# EAGLE board Commutator_Adaptor (EAGLE 9.0.0)
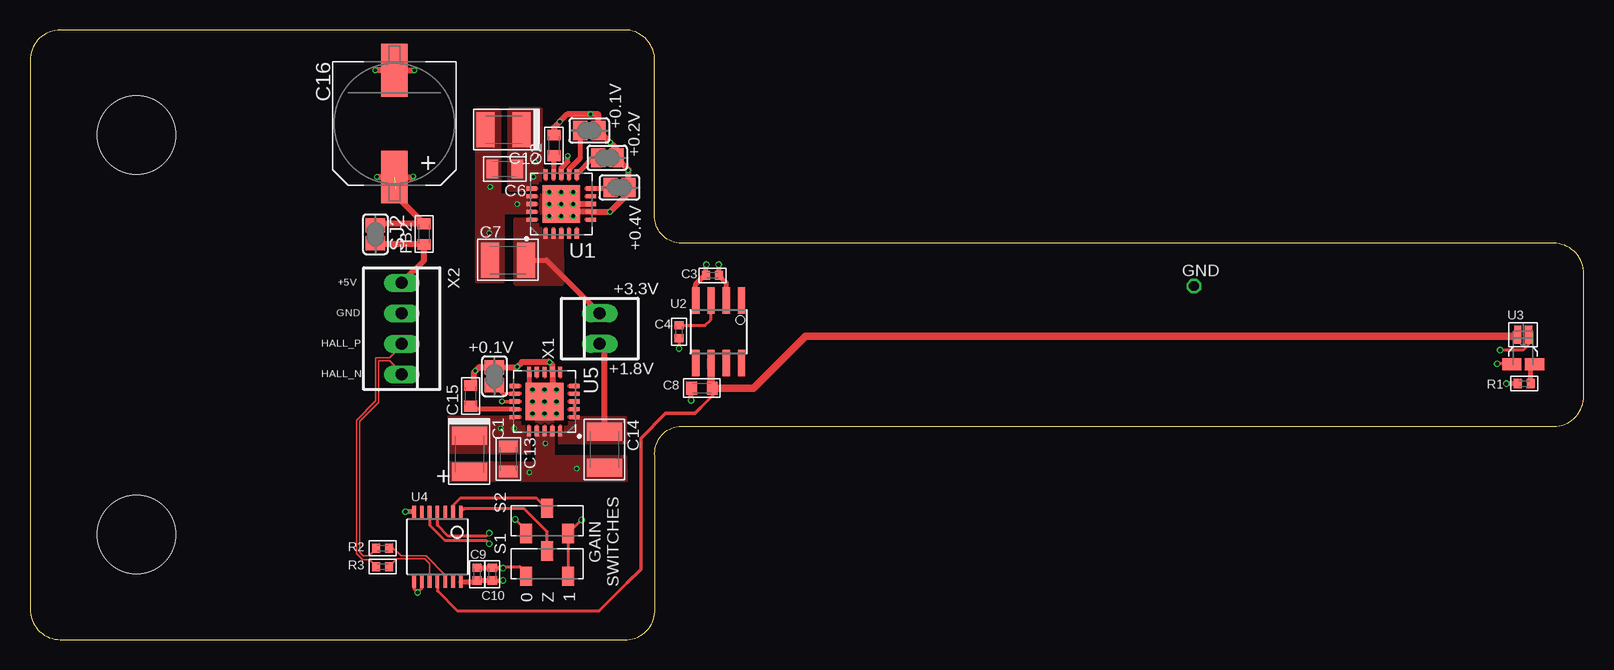
[diagram p0: board, top side]
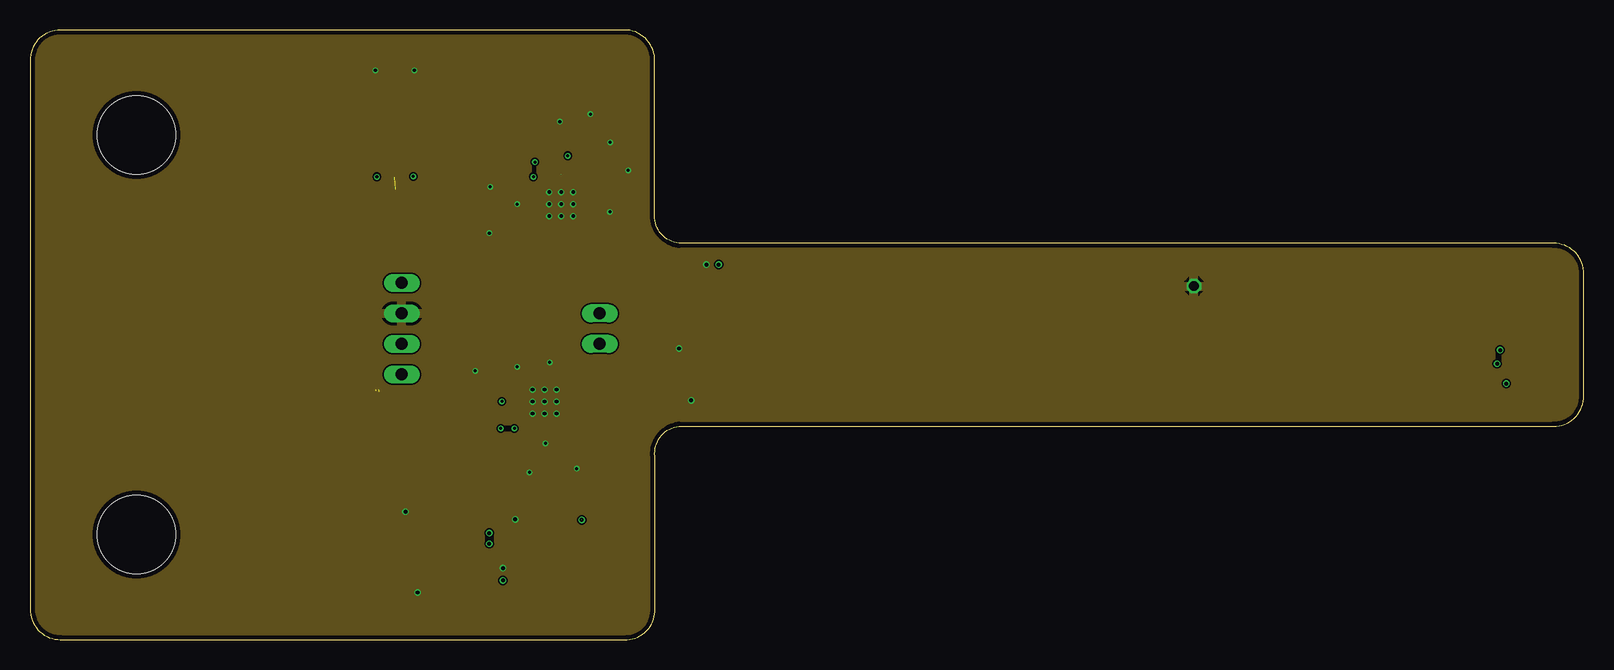
[diagram p1: board, inner layer Route2]
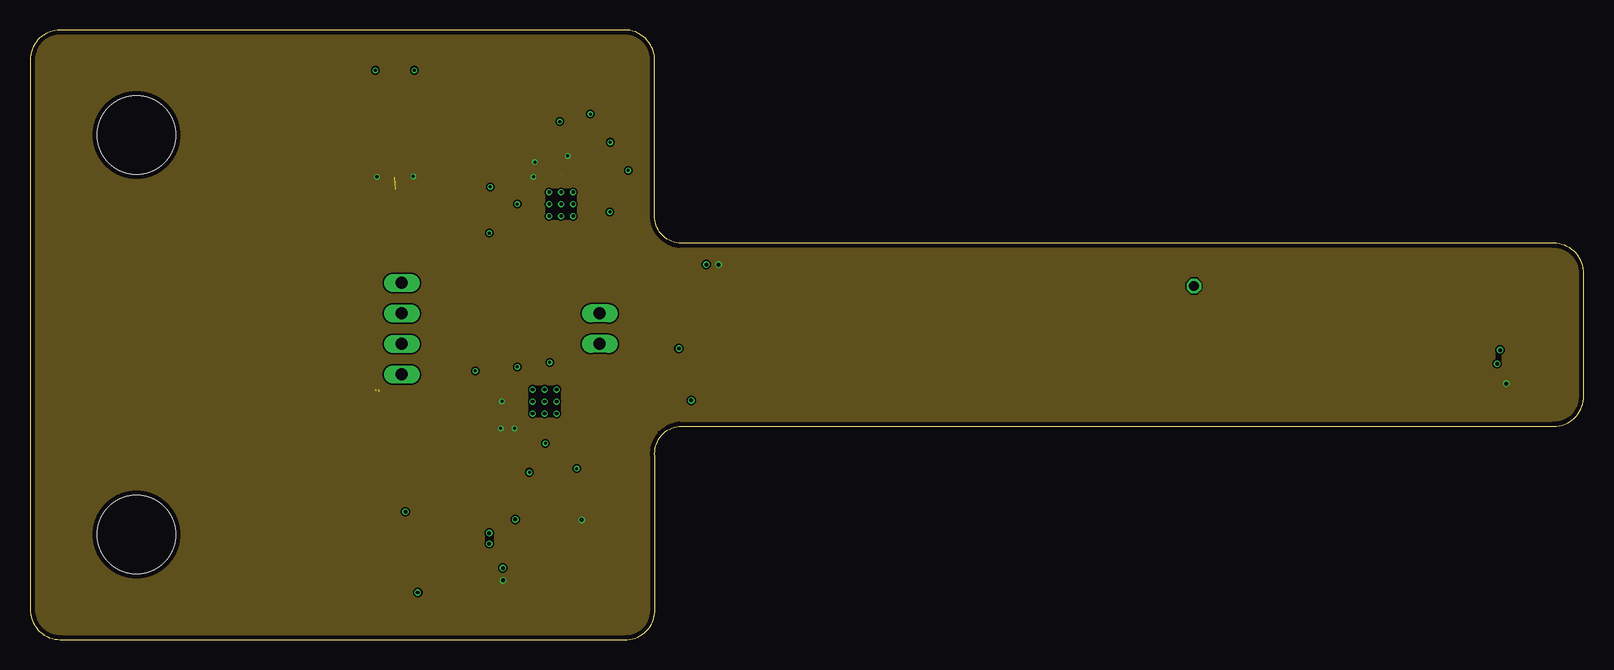
[diagram p2: board, inner layer Route15]
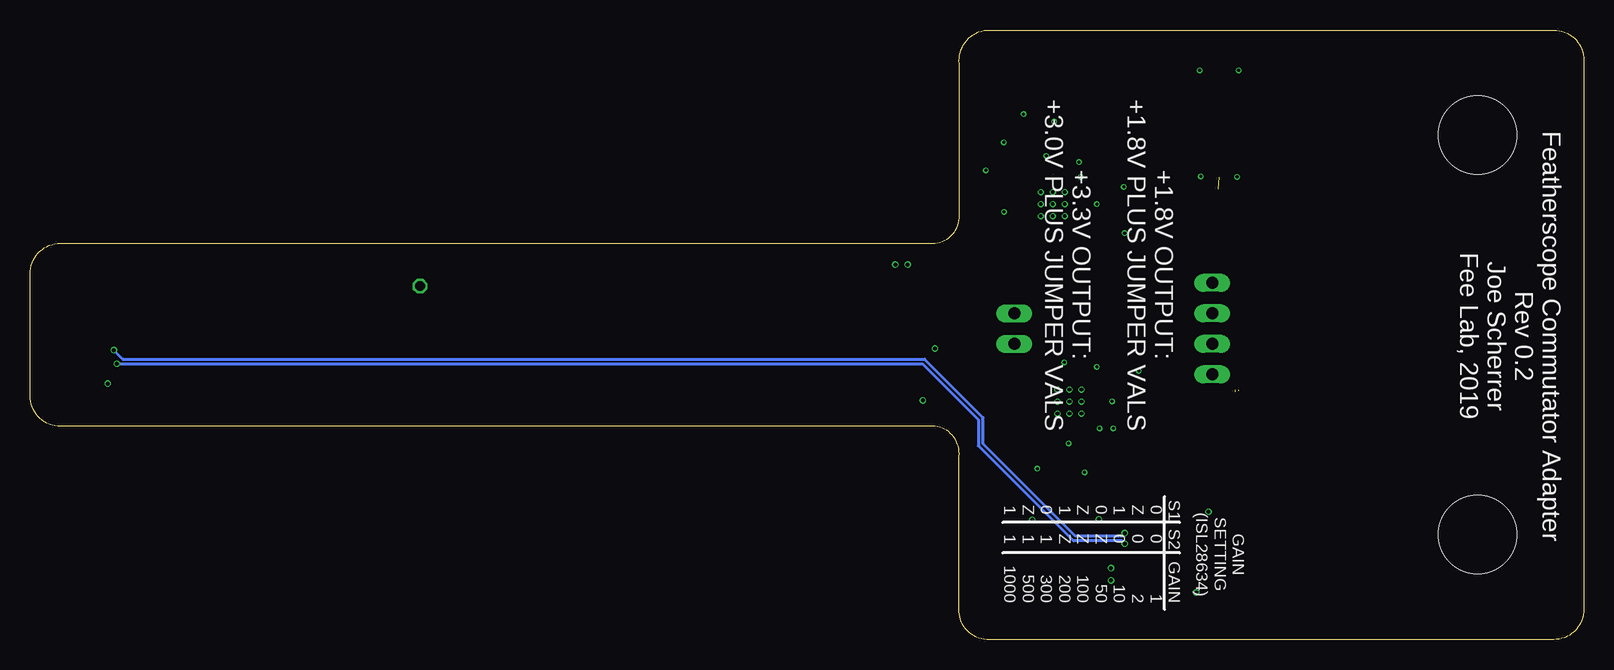
[diagram p3: board, bottom side, seen from below]

Size 129.54 x 50.8 mm. Coordinates in mm from the lower left corner, seen from the top.
Outline: 49.78,0 arc90 52.09,2.57 52.09,15.27 arc-90 54.1,17.78 127,17.78 arc90 129.54,20.32 129.54,30.48 arc90 127,33.02 54.1,33.02 arc-90 52.07,35.56 52.07,48.01 arc90 49.78,50.8 2.54,50.8 arc90 0,48.26 0,2.54 arc90 2.54,0 49.78,0
Copper layers (1*2*15*16): Top 0.035559375mm / dielectric 0.17018125mm / Route2 0.01778125mm / dielectric 47mil / Route15 0.01778125mm / dielectric 0.17018125mm / Bottom 0.035559375mm
Design rules "OSHPark-4layer *": minimum track width 5mil, minimum drill 10mil, track to track 5mil, track to pad 5mil, pad to pad 5mil, via to via 5mil, smd to smd 5mil, copper to edge 15mil, drill to drill 6mil, minimum pad ring 4mil, minimum via ring 4mil, stop-mask expansion 2.5mil, vias tented up to drill 15mil, thermal gap 10mil
Holes 6.53 mm at 8.89,8.76 8.89,42.04

## Footprints (pad centres in the part's own frame; a part is rotated, then mirrored left to right if it is on the bottom)
SJ = smd 1.168 x 1.6: 1 -0.762,0; 2 0.762,0
1210POL = smd 1.5 x 2.9: NEG 1.5,0; POS -1.5,0
0603 = smd 0.889 x 1.067: 1 -0.864,0; 2 0.864,0
0402 = smd 0.686 x 0.762: 1 -0.533,0; 2 0.533,0
0805 = smd 0.965 x 1.524: 1 -1.041,0; 2 1.041,0
1210 = smd 1.5 x 2.9: NEG 1.5,0; POS -1.5,0
JA0 = smd 4.4 x 2.2: NEG -4.45,0; POS 4.45,0
TESTPOINT_SMALL = drill 0.813 octagon: 1 0,0
CJS-1201A1 = smd 1 x 1.6: P$1 -1.75,-1.05; P$2 0,1.05; P$3 1.75,-1.05
20-VQFN(5X5) = smd 0.35 x 0.825: P1 1.3,2.487; P2 0.65,2.487; P3 0,2.487; P4 -0.65,2.487; P5 -1.3,2.487; P11 -1.3,-2.487; P12 -0.65,-2.487; P13 0,-2.487; P14 0.65,-2.487; P15 1.3,-2.487 | smd 0.825 x 0.35: P6 -2.487,1.3; P7 -2.487,0.65; P8 -2.487,0; P9 -2.487,-0.65; P10 -2.487,-1.3; P16 2.487,-1.3; P17 2.487,-0.65; P18 2.487,0; P19 2.487,0.65; P20 2.487,1.3 | smd 3.15 x 3.15: THERMAL@1 0,0 | drill 0.3: THERMAL@2 -1,1; THERMAL@3 0,1; THERMAL@4 1,1; THERMAL@5 -1,0; THERMAL@6 0,0; THERMAL@7 1,0; THERMAL@8 -1,-1; THERMAL@9 0,-1; THERMAL@10 1,-1
SO08 = smd 0.61 x 2.21: 1 -1.905,-2.616; 2 -0.635,-2.616; 3 0.635,-2.616; 4 1.905,-2.616; 5 1.905,2.616; 6 0.635,2.616; 7 -0.635,2.616; 8 -1.905,2.616
HGT-2101-SIDE = smd 0.6 x 1.5: PIN1 -0.45,0; PIN2 0.45,0 | smd 1.6 x 1: WIRE1 -0.95,-2.45; WIRE2 0.95,-2.45
TSSOP14 = smd 0.305 x 0.991: 1 -1.95,-2.918; 2 -1.3,-2.918; 3 -0.65,-2.918; 4 0,-2.918; 5 0.65,-2.918; 6 1.3,-2.918; 7 1.95,-2.918; 8 1.95,2.918; 9 1.3,2.918; 10 0.65,2.918; 11 0,2.918; 12 -0.65,2.918; 13 -1.3,2.918; 14 -1.95,2.918
22-23-2021 = drill 1 long: 1 -1.27,0; 2 1.27,0
22-23-2041 = drill 1 long: 1 -3.81,0; 2 -1.27,0; 3 1.27,0; 4 3.81,0

## Placement (x,y rotation side)
0P1  [SJ]  38.71,21.95 270 top
0P1V  [SJ]  46.62,42.42 180 top
0P2V  [SJ]  48.12,40.14 180 top
0P4V  [SJ]  49.14,37.67 180 top
C1  47uF  [1210POL]  36.64,15.47 270 top
C2  1uF  [0603]  43.68,41.18 90 top
C3  100nF  [0402]  56.9,30.35 180 top
C4  DNP  [0402]  54.1,25.65 270 top
C6  10uF  [0805]  39.57,39.21 180 top
C7  47uF  [1210]  39.83,31.62 180 top
C8  1uF  [0603]  56.01,20.96 180 top
C9  10nF  [0402]  37.27,5.45 90 top
C10  100nF  [0402]  38.54,5.45 90 top
C12  47uF  [1210POL]  39.5,42.49 180 top
C13  10uF  [0805]  39.88,15.05 270 top
C14  47uF  [1210]  47.9,15.84 270 top
C15  1uF  [0603]  36.72,20.3 90 top
C16  220uF  [JA0]  30.39,43 270 top
FB2  470  [0603]  32.85,33.79 90 top
GND  TESTPOINT_SMALL  [TESTPOINT_SMALL]  97.03,29.46 0 top
R1  1.6k  [0402]  124.56,21.34 0 top
R2  50  [0402]  29.39,7.61 180 top
R3  50  [0402]  29.39,6.08 180 top
S1  CJS-1201  [CJS-1201A1]  43.11,6.34 0 top
S2  CJS-1201  [CJS-1201A1]  43.11,9.89 0 top
SJ2  [SJ]  28.8,33.78 270 top
U1  TI_TPS7A4701  [20-VQFN(5X5)]  44.28,36.29 180 top
U2  [SO08]  57.4,25.65 180 top
U3  LAKE-SHORE_HGT-2101  [HGT-2101-SIDE]  124.46,25.4 0 top
U4  ISL2863X  [TSSOP14]  33.97,7.74 180 top
U5  TI_TPS7A4701  [20-VQFN(5X5)]  42.9,19.84 270 top
X1  22-23-2021  [22-23-2021]  47.5,25.91 90 top
X2  22-23-2041  [22-23-2041]  30.99,25.91 270 top

## Library data of the parts
0P1 0P1V 0P2V 0P4V SJ2 = jumper
C1-C4 C6-C10 C12-C16 FB2 R1-R3 S1 S2 U1-U5 = GFL
GND = RHD2000_eval_board
X1 = con-molex; MF: MOLEX; MPN: 22-23-2021; OC_FARNELL: 1462926; OC_NEWARK: 25C3832
X2 = con-molex; MF: MOLEX; MPN: 22-23-2041; OC_FARNELL: 1462920; OC_NEWARK: 38C0355

## Nets
1P8: C14.POS U5.P1 U5.P2 U5.P3 U5.P20 X1.1
2.5V: C8.1 U2.6 U3.PIN1 U4.11
3P3: C7.POS U1.P1 U1.P2 U1.P3 U1.P20 X1.2
+5V: FB2.1 SJ2.2 X2.1
+5V_COND: C1.POS C3.1 C6.1 C9.1 C10.1 C12.POS C13.1 C16.POS FB2.2 R1.1 S1.P$3 S2.P$3 SJ2.1 U1.P13 U1.P15 U1.P16 U2.2 U4.14 U5.P13 U5.P15 U5.P16
GND: 0P1.1 0P1V.1 0P2V.1 0P4V.1 C1.NEG C2.2 C3.2 C4.2 C6.2 C7.NEG C8.2 C9.2 C10.2 C12.NEG C13.2 C14.NEG C15.2 C16.NEG GND.1 S1.P$1 S2.P$1 U1.P7 U1.P8 U1.P17 U1.P18 U1.P19 U1.THERMAL@1 U1.THERMAL@2 U1.THERMAL@3 U1.THERMAL@4 U1.THERMAL@5 U1.THERMAL@6 U1.THERMAL@7 U1.THERMAL@8 U1.THERMAL@9 U1.THERMAL@10 U2.4 U4.7 U4.8 U4.9 U5.P7 U5.P10 U5.P17 U5.P18 U5.P19 U5.THERMAL@1 U5.THERMAL@2 U5.THERMAL@3 U5.THERMAL@4 U5.THERMAL@5 U5.THERMAL@6 U5.THERMAL@7 U5.THERMAL@8 U5.THERMAL@9 U5.THERMAL@10 X2.2
HALL_AMP_N: R2.1 U4.12
HALL_AMP_P: R3.1 U4.10
HALL_N: R2.2 X2.4
HALL_P: R3.2 X2.3
HALL_RAW_N: U3.WIRE1 U4.5
HALL_RAW_P: U3.PIN2 U4.4
I_HALL: R1.2 U3.WIRE2
N$1: C4.1 U2.3
N$2: S1.P$2 U4.1
N$3: C15.1 U5.P14
N$4: S2.P$2 U4.2
N$5: 0P4V.2 U1.P10
N$6: C2.1 U1.P14
N$7: 0P2V.2 U1.P11
N$8: 0P1.2 U5.P12
N$9: 0P1V.2 U1.P12

## Tracks (layer width: path | path; a pad name or v marks a point on that pad's centre or on a via)
1P8
  Top 0.305: U5.P1 U5.P2 U5.P3
  Top 0.508: C14.POS 47.9,24.24 X1.1
  pour Top (no thermals): 44.19,17.7 44.99,17.7 44.99,18.5 49.62,18.52 49.66,16.39 44.16,16.37
2.5V
  Top 0.254: U4.11 33.97,4.05 35.62,2.4 47.44,2.4 49.78,4.74 | 56.9,20.93 56.9,20.32 55.88,19.3
  Top 0.305: 49.78,4.74 50.93,5.88 50.93,16.78 52.99,18.84 55.42,18.84 55.88,19.3
  Top 0.406: U2.6 56.74,23.32 | C8.1 56.9,20.93 | 123.88,25.27 U3.PIN1
  Top 0.61: 56.74,23.32 56.77,21.72 56.77,20.96 C8.1 60.32,20.96 64.64,25.27 123.88,25.27
3P3
  Top 0.406: C7.POS 43.06,31.62 X1.2
  pour Top (no thermals): 44.29,34.2 44.31,29.67 40.52,29.67 40.52,34.99 42.21,34.99 42.21,34.22
+5V
  Top 0.508: X2.1 32.85,31.58 FB2.1 28.89,32.92 SJ2.2
+5V_COND  (via drill 0.25, 0.33)  (3 unrouted)
  Top 0.254: S1.P$3 S2.P$3 v45.99,9.97
  Top 0.305: 31.89,38.55 v31.94,38.59 | 28.94,38.55 v28.91,38.57 | U5.P13 v39.34,19.84
  Top 0.406: U4.14 37.17,4.82 C9.1 C10.1 39.4,4.92 v39.43,4.94 | v57.4,31.24 57.43,31.22 C3.1 58.04,29.74 U2.2 | R1.1 v123.06,21.34 | U1.P13 44.28,39.28 44.81,39.82 v44.81,40.32
  Top 0.508: 31.89,38.55 C16.POS 28.94,38.55 | 30.49,37.52 30.49,37.01 FB2.2 28.91,34.65 SJ2.1
  other vias: 39.24,17.59 40.39,17.59 41.96,38.57 42.09,39.79
  pour Route15: 0,0 52.07,0 51.97,17.78 129.51,17.78 129.51,33.02 52.07,33.02 52.07,50.8 0,50.8
  pour Top (no thermals): 41.62,17.75 40.81,17.75 40.81,18.52 34.94,18.57 34.94,15.59 41.62,15.54
  pour Top (no thermals): 42.59,39.09 42.56,44.14 39.96,44.14 39.99,37.55 42.21,37.55 42.21,38.27 42.24,38.27 42.24,38.34 42.96,38.34 42.96,39.09
GND  (via drill 0.25, 0.33)
  Top 0.254: S1.P$1 41.08,5.57 41.08,5.83 40.82,6.08 39.43,6.08 v39.43,5.96 | S2.P$1 41.36,9.1 v40.44,10.02 | U4.8 32.02,4.22 v32.31,3.93 32.67,4.28 U4.9 | C4.2 v54.1,24.26
  Top 0.305: v32.04,47.45 | v28.79,47.45 | U5.P7
  Top 0.406: C9.2 C10.2 39.27,5.98 v39.43,5.96 | U4.7 v31.3,10.65 v31.3,10.66 | U2.4 55.5,29.62 56.24,30.35 C3.2 56.36,31.22 v56.39,31.24 | v55.12,19.94 55.12,20.93 C8.2 | U5.P10 41.6,21.14 U5.THERMAL@8
  Top 0.508: C15.2 37.02,21.46 37.02,22.27 37.45,22.71 0P1.1 40.6,22.71 v40.62,22.72 41.02,23.12 43.19,23.12 43.24,23.17 v43.31,23.09 43.55,22.86 U5.P7 43.55,21.19 U5.THERMAL@2 | v28.79,47.45 C16.NEG v32.04,47.45 | C2.2 43.68,42.66 44.79,43.77 47.38,43.77 0P1V.1 48.88,40.92 0P2V.1 49.9,39.12 0P4V.1 49.9,37.21 v48.34,35.64 U1.P7 45.63,35.64 U1.THERMAL@2 | U1.P8 U1.THERMAL@5
  other vias: 37.12,22.39 42.96,16.34 41.64,13.95 45.56,14.25 38.37,37.72 38.29,33.87 40.62,36.3 44.16,43.17 46.71,43.79 48.37,41.45 49.87,39.09
  pour Route2: 0,0 0,50.8 52.07,50.8 52.07,33.02 129.54,33.02 129.54,17.78 52.07,17.78 52.07,0
  pour Top (no thermals): 43.56,18.59 43.59,15.22 49.64,15.25 49.69,13.22 34.94,13.27 34.94,14.77 42.27,14.7 42.27,18.59
  pour Top (no thermals): 43.12,36.95 39.12,36.95 39.12,44.07 37.27,44.07 37.27,29.89 39.39,29.89 39.39,35.67 43.12,35.67
HALL_AMP_N
  Top 0.127: 34.6,4.83 34.6,5.38 33,6.97 30.92,6.97 30.28,7.61 R2.1
  Top 0.254: 34.6,4.83 U4.12
HALL_AMP_P
  Top 0.127: U4.10 33.32,6.3 32.9,6.72 30.56,6.72 R3.1
  Top 0.254: 33.33,4.83 U4.10
HALL_N  (1 unrouted)
  Top 0.127: R2.2 28.86,7.58 28.28,7 27.77,7 27.49,7.28 27.49,18.19 29.08,19.78 29.08,20.83 | 29.08,20.65 29.08,23.24 29.97,23.24 30.99,22.23 X2.4
HALL_P  (1 unrouted)
  Top 0.127: R3.2 28.25,6.69 28.25,6.67 27.74,6.67 27.23,7.17 27.23,18.3 28.83,19.89 28.83,20.83 | 28.83,20.75 28.83,23.5 29.97,23.5 30.99,24.51 X2.3
HALL_RAW_N  (via drill 0.33)
  Top 0.254: 123.52,22.93 U3.WIRE1 123.5,22.94 123.45,22.99 v122.3,22.99 | U4.5 33.32,9.53 34.6,8.24 38.03,8.24 v38.28,7.99
  Bottom 0.254: v122.3,22.99 55.13,22.99 50.48,18.34 50.48,16.14 42.56,8.22 38.54,8.24 v38.28,7.99
HALL_RAW_P  (via drill 0.33)
  Top 0.254: 124.92,25.38 U3.PIN2 | 124.97,25.43 U3.PIN2 | U3.PIN2 124.91,24.58 124.46,24.13 v122.56,24.13 | U4.4 33.97,9.51 34.85,8.62 38.03,8.62 v38.28,8.88
  Bottom 0.254: v122.56,24.13 121.79,23.37 54.98,23.37 50.1,18.49 50.1,16.34 50.09,16.34 42.38,8.62 38.54,8.62 v38.28,8.88
I_HALL
  Top 0.254: 125.1,22.61 U3.WIRE2 125.1,22.64
  Top 0.406: R1.2 125.1,22.64
N$1
  Top 0.254: C4.1 56.29,26.19 56.77,26.67 U2.3
N$2
  Top 0.254: S1.P$2 43.11,9.01 41.2,10.91 36.17,10.91 U4.1
N$3
  Top 0.305: 36.97,19.19 C15.1
  Top 0.406: U5.P14 36.97,19.19
N$4
  Top 0.254: S2.P$2 43.08,10.94 42.22,11.8 35.87,11.8 35.24,11.16 35.24,10.68 U4.2
N$5
  Top 0.406: U1.P10 48.3,37.59 0P4V.2
N$6
  Top 0.406: C2.1 43.63,40.27 U1.P14
N$7
  Top 0.406: U1.P11 46.95,40.14 0P2V.2
N$8
  Top 0.305: U5.P12 39.41,20.49 0P1.2
N$9
  Top 0.406: 0P1V.2 45.85,40.1 44.94,39.19 U1.P12

## Text on the board
tPlace: +0.1V | +0.2V | +0.4V | +5V | +3.3V | GND | HALL_P | +0.1V | HALL_N | +1.8V | + | GAIN / SWITCHES | 0 | Z | 1
bPlace: +1.8V OUTPUT: / +1.8V PLUS JUMPER VALS / / +3.3V OUTPUT: / +3.0V PLUS JUMPER VALS | Featherscope Commutator Adapter / Rev 0.2 / Joe Scherrer / Fee Lab, 2019 | S1 / 0 / Z / 1 / 0 / Z / 1 / 0 / Z / 1 | S2 / 0 / 0 / 0 / Z / Z / Z / 1 / 1 / 1 | GAIN / SETTING / (ISL28634) | GAIN / 1 / 2 / 10 / 50 / 100 / 200 / 300 / 500 / 1000